# Altium PCB PCB_monitoring_Top_Front.PcbDoc
Units mm, origin at the board's own origin, x right, y up, seen from the top; angles counter-clockwise.
Board outline 113.5 x 32.5 mm, 2 copper layers (Top Layer, Bottom Layer), stack 1.571 mm thick; 56 components, 36 nets, 178 pads, 7 vias.
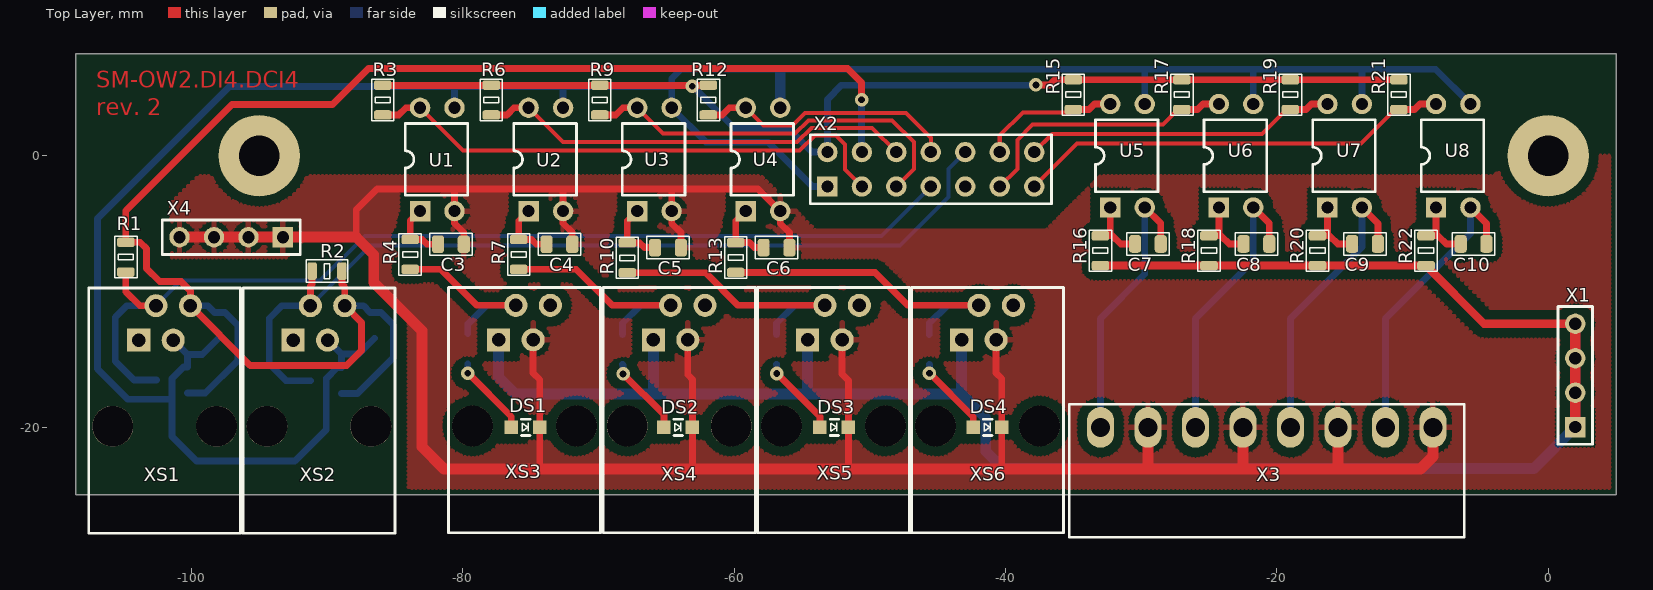
[diagram p0: Top Layer view]
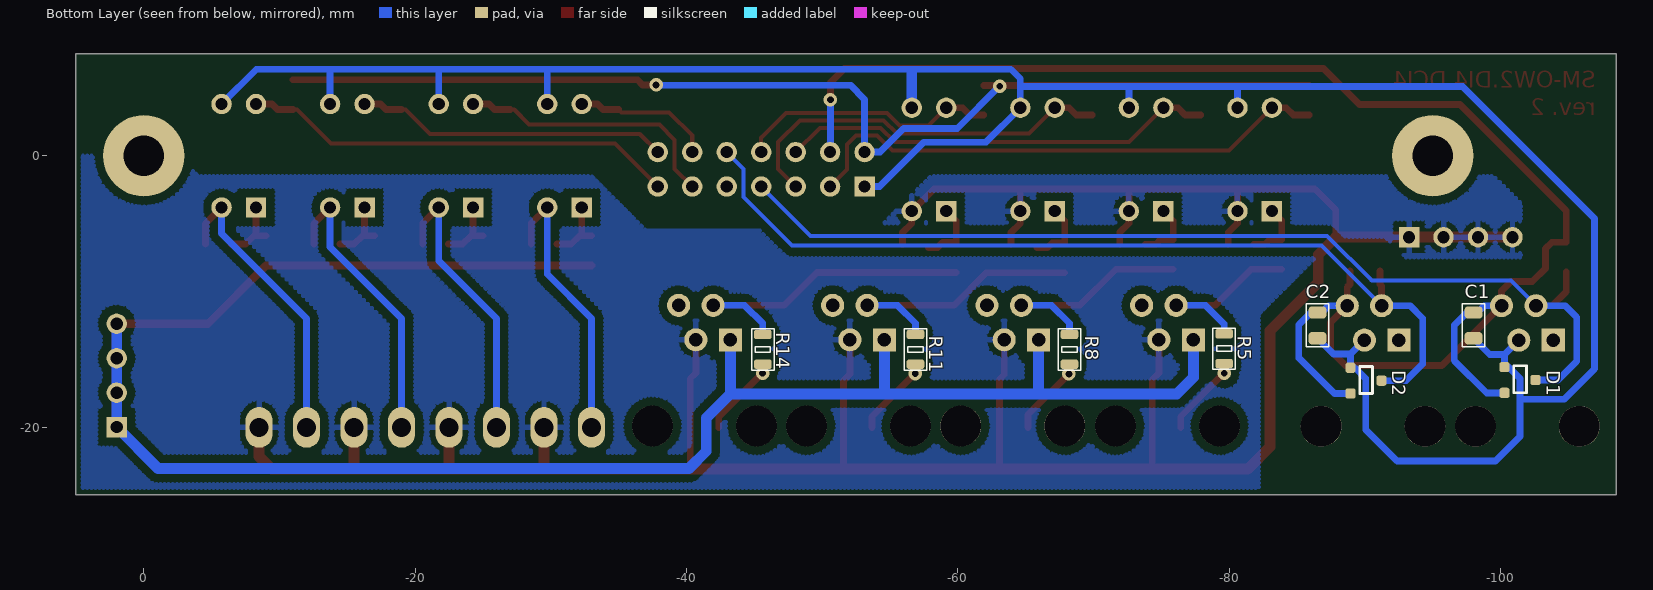
[diagram p1: Bottom Layer view, seen from below]

## Layer stack, top to bottom
Top Solder: solder mask 0.0102, Solder Resist, Dk 3.5
Top Layer: signal copper 0.0356
Dielectric 1: dielectric 1.5, FR-4, Dk 4.8
Bottom Layer: signal copper 0.0356
Bottom Solder: solder mask 0.0102, Solder Resist, Dk 3.5

## Board outline
-108.5,-25 5,-25 5,7.5 -108.5,7.5

## Design rules (kind name [scope] priority, off if disabled: settings)
Clearance Clearance_3 [InPolygon And InNetClass('GND')] p1: gap=0.4
Clearance Clearance_2 [InPolygon And OnLayer('Bottom Layer')] p2: gap=0.6
Clearance Clearance_1 [InPolygon And OnLayer('Top Layer')] p3: gap=0.7
Clearance [All] p4: gap=0.25
ComponentClearance [All] p1: gap=0 collisioncheckmode=3 verticalgap=0 showdistances=FALSE
Height [All] p1: minheight=0 maxheight=30 prefheight=12.7
HoleSize [All] p1: absolutevalues=TRUE maxlimit=5 minlimit=0.2 maxpercent=80.000 minpercent=20.000
HoleToHoleClearance [All] p1: gap=0.25 allowstackedmicrovias=TRUE
MinimumSolderMaskSliver [All] p1: minsoldermaskwidth=0
PlaneClearance [All] p1: clearance=0.5
PlaneConnect [All] p1: planeconnectstyle=Relief reliefexpansion=0.5 reliefentries=4 reliefconductorwidth=0.3 reliefairgap=0.25
PolygonConnect [All] p1: connectstyle=Relief reliefconductorwidth=0.4 reliefentries=4 polygonreliefangle="90 Angle" airgapwidth=0.4
RoutingCorners [All] p1: cornerstyle=45-Degree minsetback=2 maxsetback=2
RoutingVias [All] p1: holewidth=0.8 width=1.3 viastyle="Through Hole" minholewidth=0.3 minwidth=0.8 maxholewidth=5 maxwidth=7
SilkToBoardRegionClearance [All] p1 off:
SilkToSilkClearance [All] p1: silktosilkclearance=0
SilkToSolderMaskClearance [IsPad] p1: minsilkscreentomaskgap=0 clearancetoexposedcopper=TRUE
SolderMaskExpansion [All] p1: expansion=0.1
Width [All] p1: maxlimit=4 minlimit=0.25 preferedwidth=0.5 minimp=50.000000 maximp=50.000000 favimp=50.000000
19 further rules are at their usual default settings.

## Components (designator, comment, footprint, x,y, rotation, side; value= is the part's Value field where it differs from the comment)
C1 "Cap_Semi" C_0805 -98,-12.5 r270 bottom
C2 "Cap_Semi" C_0805 -86.5,-12.5 r270 bottom
C3 "Cap_Semi" C_0805 -80.87,-6.52 r0 top
C4 "Cap_Semi" C_0805 -72.87,-6.52 r0 top
C5 "Cap_Semi" C_0805 -64.87,-6.77 r0 top
C6 "Cap_Semi" C_0805 -56.87,-6.77 r0 top
C7 "Cap_Semi" C_0805 -29.5,-6.5 r0 top
C8 "Cap_Semi" C_0805 -21.5,-6.5 r0 top
C9 "Cap_Semi" C_0805 -13.5,-6.5 r0 top
C10 "Cap_Semi" C_0805 -5.5,-6.5 r0 top
D1 "BAT54S" SOT-23_d -101.425,-16.525 r180 bottom
D2 "BAT54S" SOT-23_d -90.075,-16.575 r180 bottom
DS1 "Green" LED_SMD_0805 -75.37,-20.02 r90 top
DS2 "Green" LED_SMD_0805 -64.12,-20.02 r90 top
DS3 "Green" LED_SMD_0805 -52.62,-20.02 r90 top
DS4 "Green" LED_SMD_0805 -41.32,-20.02 r90 top
R1 "Resistor" R_0805 -104.825,-7.475 r90 top
R2 "Resistor" R_0805 -90,-8.5 r0 top
R3 "Resistor" R_0805 -85.895,4.105 r270 top
R4 "Resistor" R_0805 -83.87,-7.27 r270 top
R5 "Resistor" R_0805 -79.62,-14.22 r90 bottom
R6 "Resistor" R_0805 -77.895,4.105 r270 top
R7 "Resistor" R_0805 -75.87,-7.27 r270 top
R8 "Resistor" R_0805 -68.22,-14.27 r90 bottom
R9 "Resistor" R_0805 -69.895,4.105 r270 top
R10 "Resistor" R_0805 -67.87,-7.52 r270 top
R11 "Resistor" R_0805 -56.87,-14.27 r90 bottom
R12 "Resistor" R_0805 -61.895,4.105 r270 top
R13 "Resistor" R_0805 -59.875,-7.5 r270 top
R14 "Resistor" R_0805 -45.62,-14.27 r90 bottom
R15 "Resistor" R_0805 -35,4.5 r270 top
R16 "Resistor" R_0805 -33,-7 r270 top
R17 "Resistor" R_0805 -27,4.5 r270 top
R18 "Resistor" R_0805 -25,-7 r270 top
R19 "Resistor" R_0805 -19,4.5 r270 top
R20 "Resistor" R_0805 -17,-7 r270 top
R21 "Resistor" R_0805 -11,4.5 r270 top
R22 "Resistor" R_0805 -9,-7 r270 top
U1 "PC817C" DIP-4 -81.87,-0.27 r0 top
U2 "PC817C" DIP-4 -73.87,-0.27 r0 top
U3 "PC817C" DIP-4 -65.87,-0.27 r0 top
U4 "PC817C" DIP-4 -57.87,-0.27 r0 top
U5 "PC817C" DIP-4 -31,0 r0 top
U6 "PC817C" DIP-4 -23,0 r0 top
U7 "PC817C" DIP-4 -15,0 r0 top
U8 "PC817C" DIP-4 -7,0 r0 top
X1 "ZL2029" PLS-4-3D 2,-20 r90 top locked
X2 "PLS2-14" PLS2-14 -45.5,-1 r0 top locked
X3 "15EDGRC-3.5-08P" MC_3.5_8 -20.745,-20.02 r0 top locked
X4 "PLS-4" PLS-4-3D -93.25,-6 r180 top locked
XS1 "RJ-11" "RJ-11 - TJ4-4P4C" -101.97,-15.495 r180 top locked
XS2 "RJ-11" "RJ-11 - TJ4-4P4C" -90.595,-15.495 r180 top locked
XS3 "RJ-11" "RJ-11 - TJ4-4P4C" -75.445,-15.47 r180 top locked
XS4 "RJ-11" "RJ-11 - TJ4-4P4C" -64.045,-15.47 r180 top locked
XS5 "RJ-11" "RJ-11 - TJ4-4P4C" -52.67,-15.47 r180 top locked
XS6 "RJ-11" "RJ-11 - TJ4-4P4C" -41.32,-15.47 r180 top locked

## Footprints (in the part's own frame and the unit in brackets; to place one, negate y for a bottom-side part, rotate by r counter-clockwise, add the part's x,y. Pads: shape width x height; smd on the part's side, far side on the other; paste and mask are expansions set on the pad)
C_0805 [mm] "Ceramic Capacitors SMD"
  rrect50% 0.9x1.3 smd: 1(-0.95,0) 2(0.95,0)
  silkscreen extent -1.58,-0.82 1.58,0.82, body extent -1,-0.62 1,0.63, height 0.78
DIP-4 [mm]
  rect 1.5x1.5 hole 0.9: 1(-1.27,-3.81)
  round 1.5 hole 0.9: 2(1.27,-3.81) 3(1.27,3.81) 4(-1.27,3.81)
  silkscreen extent -2.36,-2.65 2.25,2.65, body extent -2.82,-4.03 2.73,3.98, height 4.31
LED_SMD_0805 [mm]
  rect 1x1 smd: 1(0,1.05) 2(0,-1.05)
  silkscreen extent -0.6,-0.33 0.6,0.3, body extent -0.46,-1.03 0.45,1.03, height 0.85
MC_3.5_8 [mm]
  oval 2x3 hole 1.4: 1(-12.25,0) 2(-8.75,0) 3(-5.25,0) 4(-1.75,0) 5(1.75,0) 6(5.25,0) 7(8.75,0) 8(12.25,0)
  silkscreen extent -14.55,-8.1 14.55,1.7, body extent -14.4,-7.95 14.4,1.25, height 7.2
PLS2-14 [mm] "Connector; Header; 14 Position"
  rect 1.5x1.5 hole 0.9: 1(-7.62,-1.27)
  round 1.5 hole 0.9: 2(-5.08,-1.27) 3(-2.54,-1.27) 4(0,-1.27) 5(2.54,-1.27) 6(5.08,-1.27) 7(7.62,-1.27) 8(7.62,1.27) 9(5.08,1.27) 10(2.54,1.27) 11(0,1.27) 12(-2.54,1.27) 13(-5.08,1.27) 14(-7.62,1.27)
  silkscreen extent -8.89,-2.54 8.89,2.54, body extent -8.89,-2.54 8.89,2.54, height 8.44
PLS-4-3D [mm] "Connector; Header; 4 Position"
  rect 1.5x1.5 hole 0.9: 1(0,0)
  round 1.5 hole 0.9: 2(2.54,0) 3(5.08,0) 4(7.62,0)
  silkscreen extent -1.27,-1.27 8.89,1.27, body extent -1.27,-1.27 8.89,1.27, height 8.44
R_0805 [mm] "Resistor Pattern"
  rrect50% 0.7x1.3 smd: 1(-1.1,0) 2(1.1,0)
  silkscreen extent -1.53,-0.82 1.53,0.83, body extent -1.15,-0.67 1.15,0.68, height 0.76
"RJ-11 - TJ4-4P4C" [mm] "Telephone connector"
  round 3 hole 3 unplated: 0(-3.83,4.445) 0(3.83,4.445)
  rect 1.7x1.7 hole 1: 1(1.905,-1.905)
  round 1.7 hole 1: 2(0.635,-4.445) 3(-0.635,-1.905) 4(-1.905,-4.445)
  silkscreen extent -5.6,-5.75 5.6,12.32, body extent -5.6,-5.75 5.6,12.32, height 11.5
SOT-23_d [mm]
  rrect50% 0.76x0.76 smd: 1(-1.145,0.95) 2(-1.145,-0.95) 3(1.145,0)
  silkscreen extent -0.47,-0.95 0.48,1.05, body extent -1.37,-1.53 1.27,1.47, height 1.08

## Part data
C1 C2 C3 C4 C5 C6 C7 C8 C9 C10: "Capacitor semi"
D1 D2: "Diode Schottky"
DS1 DS2 DS3 DS4: library part LED, "LED_SMD"
U1 U2 U3 U4 U5 U6 U7 U8: library part PC817, "Optocoupler"
X1: library part PLS-4, "Header, 4-Pin"
X2: "Header, 14-Pin"
X3: library part MC_3.5_8, "Connector 3.5mm"
X4: "ZL2029"
XS1 XS2 XS3 XS4 XS5 XS6: "TJ4-4P4C"

## Free pads (board coordinates)
  round 6 hole 3: 0(-95,0) 0(0,0)

## Via types
v1: diameter 1, hole 0.5, Top Layer to Bottom Layer, 7 vias

## Nets (pads, with @x,y where several pads share a name; then routed paths per layer and width w, separated by ;. In a path a pad name is that pad's centre, name@x,y a point inside that pad or via, vN(x,y) a via of type N, cw(c..) or ccw(c..) an arc to the next point about the centre after c; other vN are vias at no path point)
1-WIRE3_T: D1.3 R1.1 X2.4 XS1.2 | length 75
  Top Layer w0.5: R1.1 -104.825,-10.025 -103.8,-11.05 XS1.2
  Bottom Layer w0.3: XS1.2 -100.755,-9.2 -90.5,-9.2 -87.2,-5.9 -49.13,-5.9 X2.4
  Bottom Layer w0.5: XS1.2 -104.75,-11.05 -105.6,-11.9 -105.6,-15.15 -104.225,-16.525 D1.3
1-WIRE4_T: D2.3 R2.1 X2.10 XS2.2 | length 67.1
  Top Layer w0.5: XS2.2 -91.225,-11.045 -91.225,-9.6 -91.1,-9.475 R2.1
  Bottom Layer w0.3: XS2.2 -86.805,-6.625 -47.775,-6.625 -44.2,-3.05 -44.2,-0.97 X2.10
  Bottom Layer w0.5: XS2.2 -93.325,-11.05 -94.25,-11.975 -94.25,-15.35 -93.025,-16.575 D2.3
1-WIRE5_T: X2.5
3.3V_T: R3.1 R6.1 R9.1 R12.1 R15.1 R17.1 R19.1 R21.1 X2.14 | length 82.6
  Top Layer w0.5: R3.1@-85.895,5.175 R12.1@-61.895,5.175 ; v1(-37.75,5.225) -36.75,5.225 -36.375,5.6 R15.1 R21.1
  Bottom Layer w0.5: v1(-63.075,5.125) -59.95,2 -56,2 -54.27,0.27 X2.14 -53.12,4.155 -52.075,5.2 v1@-37.75,5.2
5V_T: C1.1 C2.1 D1.2 D2.2 R1.2 R2.2 X2.13 XS1.4 XS2.4 | length 118.8
  Top Layer w0.5: R2.2 -88.9,-9.475 -88.69,-9.685 XS2.4 -87.45,-12.29 -87.45,-14.35 -88.55,-15.45 -95.665,-15.45 XS1.4 -100.065,-9.96 -100.75,-9.275 -102.325,-9.275 -103.3,-8.3 -103.3,-6.85 -103.775,-6.375 R1.2 -104.825,-4.05 -97,3.775 -89.6,3.775 -86.95,6.425 -51.625,6.425 -50.6,5.4 v1(-50.6,4.125)
  Bottom Layer w0.5: D1.2 -98.975,-17.475 -96.575,-15.075 -96.575,-12.5 -97.525,-11.55 C1.1 -98.3,-11.55 -98.8,-11.05 XS1.4 ; D2.2 -87.75,-17.525 -85.125,-14.9 -85.125,-12.45 -86.025,-11.55 C2.1 -86.825,-11.55 -87.325,-11.05 XS2.4 ; X2.13@-50.6,0.29 v1(-50.6,4.125)
12V_EXT_T: R16.2 R18.2 R20.2 R22.2 X1.1 X1.2 X1.3 X1.4 XS3.1 XS4.1 XS5.1 XS6.1 | length 151.5
  Top Layer w0.6: R16.2 R18.2 R20.2 R22.2 -4.72,-12.38 X1.4
  Top Layer w0.8: X1.1 X1.2 X1.3 X1.4
  Bottom Layer w0.8: XS3.1 -77.35,-16.325 -76.125,-17.55 -65.95,-17.55 ; XS4.1 -65.95,-17.55 ; -54.575,-17.5 XS5.1 ; XS6.1 -43.225,-17.55 ; X1.4 X1.3 X1.2 X1.1 -1.05,-23.05 -40.175,-23.05 -41.45,-21.775 -41.45,-19.325 -43.225,-17.55 ; -65.95,-17.55 -43.225,-17.55
DCI1: C7.2 U5.2 X3.1 | length 20.7
  Top Layer w0.5: U5.2 -28.55,-4.99 C7.2
  Bottom Layer w0.5: X3.1 -32.995,-11.995 -29.73,-8.73 U5.2
DCI2: C8.2 U6.2 X3.3 | length 21.2
  Top Layer w0.5: U6.2 -20.55,-4.99 C8.2
  Bottom Layer w0.5: X3.3 -25.995,-11.995 -21.73,-7.73 U6.2
DCI3: C9.2 U7.2 X3.5 | length 21.6
  Top Layer w0.5: U7.2 -12.55,-4.99 C9.2
  Bottom Layer w0.5: X3.5 -18.995,-11.995 -13.73,-6.73 U7.2
DCI4: C10.2 U8.2 X3.7 | length 22
  Top Layer w0.5: U8.2 -4.55,-4.99 C10.2
  Bottom Layer w0.5: X3.7 -11.995,-11.995 -5.73,-5.73 U8.2
DI5: R4.2 R5.2 XS3.2 | length 13.7
  Top Layer w0.5: R4.2 -81.605,-8.37 -78.95,-11.025 XS3.2
  Bottom Layer w0.5: R5.2 -79.62,-12.395 -78.25,-11.025 XS3.2
DI6: R7.2 R8.2 XS4.2 | length 17.2
  Top Layer w0.5: R7.2 -71.63,-8.37 -68.975,-11.025 XS4.2
  Bottom Layer w0.5: R8.2 -68.22,-12.345 -66.9,-11.025 XS4.2
DI7: R10.2 R11.2 XS5.2 | length 20.5
  Top Layer w0.5: R10.2 -62.105,-8.62 -59.7,-11.025 XS5.2
  Bottom Layer w0.5: R11.2 -56.87,-12.345 -55.55,-11.025 XS5.2
DI8: R13.2 R14.2 XS6.2 | length 23.9
  Top Layer w0.5: R13.2 -49.6,-8.6 -47.175,-11.025 XS6.2
  Bottom Layer w0.5: R14.2 -45.62,-12.37 -44.275,-11.025 XS6.2
GND_EXT_T: C3.2 C4.2 C5.2 C6.2 DS1.2 DS2.2 DS3.2 DS4.2 U1.2 U2.2 U3.2 U4.2 X3.2 X3.4 X3.6 X3.8 X4.1 X4.2 X4.3 X4.4 XS3.3 XS4.3 XS5.3 XS6.3 | length 206.4
  Top Layer w0.5: -87.85,-6 -87.85,-4 -86.3,-2.45 -80.6,-2.45 ; C3.2 -79.92,-5.655 -80.6,-4.975 U1.2 -80.6,-2.45 ; XS3.3 -74.81,-16.015 -74.32,-16.505 DS1.2 -74.32,-23.07 ; C4.2 -71.92,-5.655 -72.6,-4.975 U2.2 -72.6,-2.45 ; -64.6,-2.475 U3.2 -64.6,-4.975 -63.92,-5.655 C5.2@-63.92,-6.52 ; XS4.3 -63.41,-16.14 -63.07,-16.48 DS2.2 -63.07,-23.07 ; C6.2@-55.92,-6.52 -55.92,-5.655 -56.6,-4.975 U4.2 -58.23,-2.45 -72.6,-2.45 ; XS5.3 -52.035,-16.09 -51.57,-16.555 DS3.2 -51.57,-23.07 ; XS6.3 -40.685,-16.015 -40.27,-16.43 DS4.2 -40.27,-23.07 ; -80.6,-2.45 -72.6,-2.45
  Top Layer w0.8: X4.4 X4.3 X4.2 X4.1 -87.85,-6 -86.55,-7.3 -86.55,-9.35 -83,-12.9 -83,-21.45 -81.375,-23.075 -9.4,-23.075 -8.495,-22.17 X3.8 ; -29.495,-23.055 X3.2 ; -22.495,-23.07 X3.4 ; -15.495,-23.07 X3.6
GND_T: C1.2 C2.2 D1.1 D2.1 U1.3 U2.3 U3.3 U4.3 U5.3 U6.3 U7.3 U8.3 X2.1 XS1.3 XS2.3 | length 188
  Bottom Layer w0.5: -101.525,-17.95 -104.675,-17.95 -106.925,-15.7 -106.925,-4.625 -97.2,5.1 -80.6,5.1 ; XS1.3 -100.28,-14.645 ; C1.2 -99.195,-14.645 -100.28,-14.645 ; XS2.3 -88.93,-14.62 ; C2.2 -87.67,-14.62 -88.93,-14.62 ; U1.3 -80.6,5.1 ; U2.3 -72.6,5.075 ; -64.6,5.1 -80.6,5.1 ; X2.1 -54.23,-2.27 -57.5,1 -62.06,1 U3.3 -64.6,5.675 -63.9,6.375 -8.295,6.375 U8.3 ; U5.3 -29.73,6.355 ; U6.3 -21.73,6.355 ; U7.3 -13.73,6.355 ; -100.28,-14.645 D1.1 -100.575,-15.575 -101.425,-16.425 -101.425,-20.7 -99.625,-22.5 -92.375,-22.5 -90.05,-20.175 -90.05,-16.425 -89.25,-15.625 D2.1 -88.93,-14.62
  Bottom Layer w0.8: U4.3 -56.6,6.2
IN_D5_T: R3.2 U1.4 X2.2 | length 40
  Top Layer w0.3: U1.4 -79.975,0.375 -55.175,0.375 -54.05,1.5 -52.5,1.5 -51.825,0.825 -51.825,-1.025 X2.2
  Top Layer w0.5: R3.2 -84.72,3.005 -84.185,3.54 U1.4
IN_D6_T: R6.2 U2.4 X2.12 | length 32.3
  Top Layer w0.3: U2.4 -72.6,1 -55.35,1 -54.3,2.05 -49.82,2.05 X2.12
  Top Layer w0.5: R6.2 -76.745,3.005 -76.21,3.54 U2.4
IN_D7_T: R9.2 U3.4 X2.3 | length 29
  Top Layer w0.3: U3.4 -65.225,1.625 -55.503,1.625 -54.528,2.6 -48.35,2.6 -46.75,1 -46.75,-0.98 X2.3
  Top Layer w0.5: R9.2 -68.72,3.005 -68.185,3.54 U3.4
IN_D8_T: R12.2 U4.4 X2.11 | length 19.4
  Top Layer w0.3: U4.4 -57.825,2.225 -55.7,2.225 -54.775,3.15 -47.325,3.15 -45.5,1.325 X2.11
  Top Layer w0.5: R12.2 -60.87,3.005 -60.335,3.54 U4.4
ISR1_T: R15.2 U5.4 X2.9 | length 10.3
  Top Layer w0.3: X2.9 -40.42,1.48 -38.7,3.2 -35.2,3.2 R15.2
  Top Layer w0.5: R15.2 -33.85,3.4 -33.44,3.81 U5.4
ISR2_T: R17.2 U6.4 X2.6 | length 19.9
  Top Layer w0.3: X2.6 -39.125,-0.975 -39.125,1.175 -38,2.3 -28.4,2.3 -27.3,3.4 R17.2
  Top Layer w0.5: R17.2 -25.85,3.4 -25.44,3.81 U6.4
ISR3_T: R19.2 U7.4 X2.8 | length 23.1
  Top Layer w0.3: X2.8 -36.55,1.6 -21.1,1.6 -19.3,3.4 R19.2
  Top Layer w0.5: R19.2 -17.85,3.4 -17.44,3.81 U7.4
ISR4_T: R21.2 U8.4 X2.7 | length 32.1
  Top Layer w0.3: X2.7 -34.71,0.9 -13.8,0.9 -11.3,3.4 R21.2
  Top Layer w0.5: R21.2 -9.85,3.4 -9.44,3.81 U8.4
NetC3_1: C3.1 R4.1 U1.1 | length 4.6
  Top Layer w0.5: U1.1 -83.87,-4.81 R4.1 -82.98,-6.17 -82.63,-6.52 C3.1
NetC4_1: C4.1 R7.1 U2.1 | length 4.6
  Top Layer w0.5: U2.1 -75.87,-4.81 R7.1 -74.93,-6.17 -74.58,-6.52 C4.1
NetC5_1: C5.1 R10.1 U3.1 | length 4.8
  Top Layer w0.5: U3.1 -67.87,-4.81 R10.1 -66.955,-6.42 -66.605,-6.77 C5.1
NetC6_1: C6.1 R13.1 U4.1 | length 4.8
  Top Layer w0.5: U4.1 -59.875,-4.815 R13.1 -58.875,-6.4 -58.505,-6.77 C6.1
NetC7_1: C7.1 R16.1 U5.1 | length 4.7
  Top Layer w0.5: R16.1 -32.1,-5.9 -31.5,-6.5 C7.1 ; -32.27,-5.73 U5.1
NetC8_1: C8.1 R18.1 U6.1 | length 4.7
  Top Layer w0.5: R18.1 -24.1,-5.9 -23.5,-6.5 C8.1 ; -24.27,-5.73 U6.1
NetC9_1: C9.1 R20.1 U7.1 | length 4.7
  Top Layer w0.5: R20.1 -16.1,-5.9 -15.5,-6.5 C9.1 ; -16.27,-5.73 U7.1
NetC10_1: C10.1 R22.1 U8.1 | length 4.7
  Top Layer w0.5: R22.1 -8.1,-5.9 -7.5,-6.5 C10.1 ; -8.27,-5.73 U8.1
NetDS1_1: DS1.1 R5.1 | length 6
  Top Layer w0.5: v1(-79.625,-16.025) -76.42,-19.23 DS1.1
  Bottom Layer w0.5: v1(-79.625,-16.025) R5.1@-79.625,-15.325
NetDS2_1: DS2.1 R8.1 | length 5.9
  Top Layer w0.5: v1(-68.175,-16.075) -65.17,-19.08 DS2.1
  Bottom Layer w0.5: R8.1 -68.175,-15.415 v1(-68.175,-16.075)
NetDS3_1: DS3.1 R11.1 | length 6
  Top Layer w0.5: v1(-56.85,-16.05) -53.67,-19.23 DS3.1
  Bottom Layer w0.5: R11.1 -56.85,-15.39 v1(-56.85,-16.05)
NetDS4_1: DS4.1 R14.1 | length 6
  Top Layer w0.5: v1(-45.6,-16.025) -42.37,-19.255 DS4.1
  Bottom Layer w0.5: R14.1 -45.6,-15.39 v1(-45.6,-16.025)
pads on no net: XS1.0 XS1.1 XS2.0 XS2.1 XS3.0 XS3.4 XS4.0 XS4.4 XS5.0 XS5.4 XS6.0 XS6.4

## Polygon pours and split planes (outlines as drawn)
GND_EXT_T on Top Layer "ext_gnd" (hatched 90Degree grid 0.3 track 0.3, pour order 0): 4.5,-24.5 4.5,0 -2,0 -2.5,0 -4,-1.5 -21,-1.5 -33,-1.5 -35.5,-4 -37,-5.5 -42.5,-5.5 -54,-5.5 -57,-2.5 -58,-1.5 -87.5,-1.5 -99.5,-1.5 -101,-3 -101.5,-3.5 -101.5,-6 -101.5,-7.5 -95,-7.5 -93,-7.5 -92,-6.5 -91.5,-6 -90,-6 -87.85,-6 -86.85,-7 -86.5,-7.35 -86.5,-9.4 -83.9,-12 -84,-12.1 -84,-24.5
GND_EXT_T on Bottom Layer "ext_gnd" (hatched 90Degree grid 0.3 track 0.3, pour order 2): 4.5,-24.5 4.5,0 -2,0 -2.5,0 -4,-1.5 -21,-1.5 -33,-1.5 -35.5,-4 -37,-5.5 -42.5,-5.5 -54,-5.5 -57,-2.5 -58,-1.5 -87.5,-1.5 -99.5,-1.5 -101,-3 -101.5,-3.5 -101.5,-6 -101.5,-7.5 -95,-7.5 -93,-7.5 -92,-6.5 -91.5,-6 -90,-6 -87.85,-6 -86.85,-7 -86.5,-7.35 -82.175,-11.675 -82.175,-24.5

## Other copper
Top Layer:
  text "SM-OW2.DI4.DCI4" at -107,5 h1.2
  text "rev. 2" at -107,3 h1.2

## Silkscreen, mask and mechanical layers (free items; w line width, h text height)
Mechanical 3:
  the board outline again, w0.2
Mechanical 4:
  the board outline again, w0.2